# Altium PCB 无人驾驶车ECUV3.PcbDoc
Units mm, origin at the board's own origin, x right, y up, seen from the top; angles counter-clockwise.
Board outline 152.4 x 101.6 mm, 2 copper layers (Top Layer, Bottom Layer); 58 components, 64 nets, 464 pads, 98 vias.
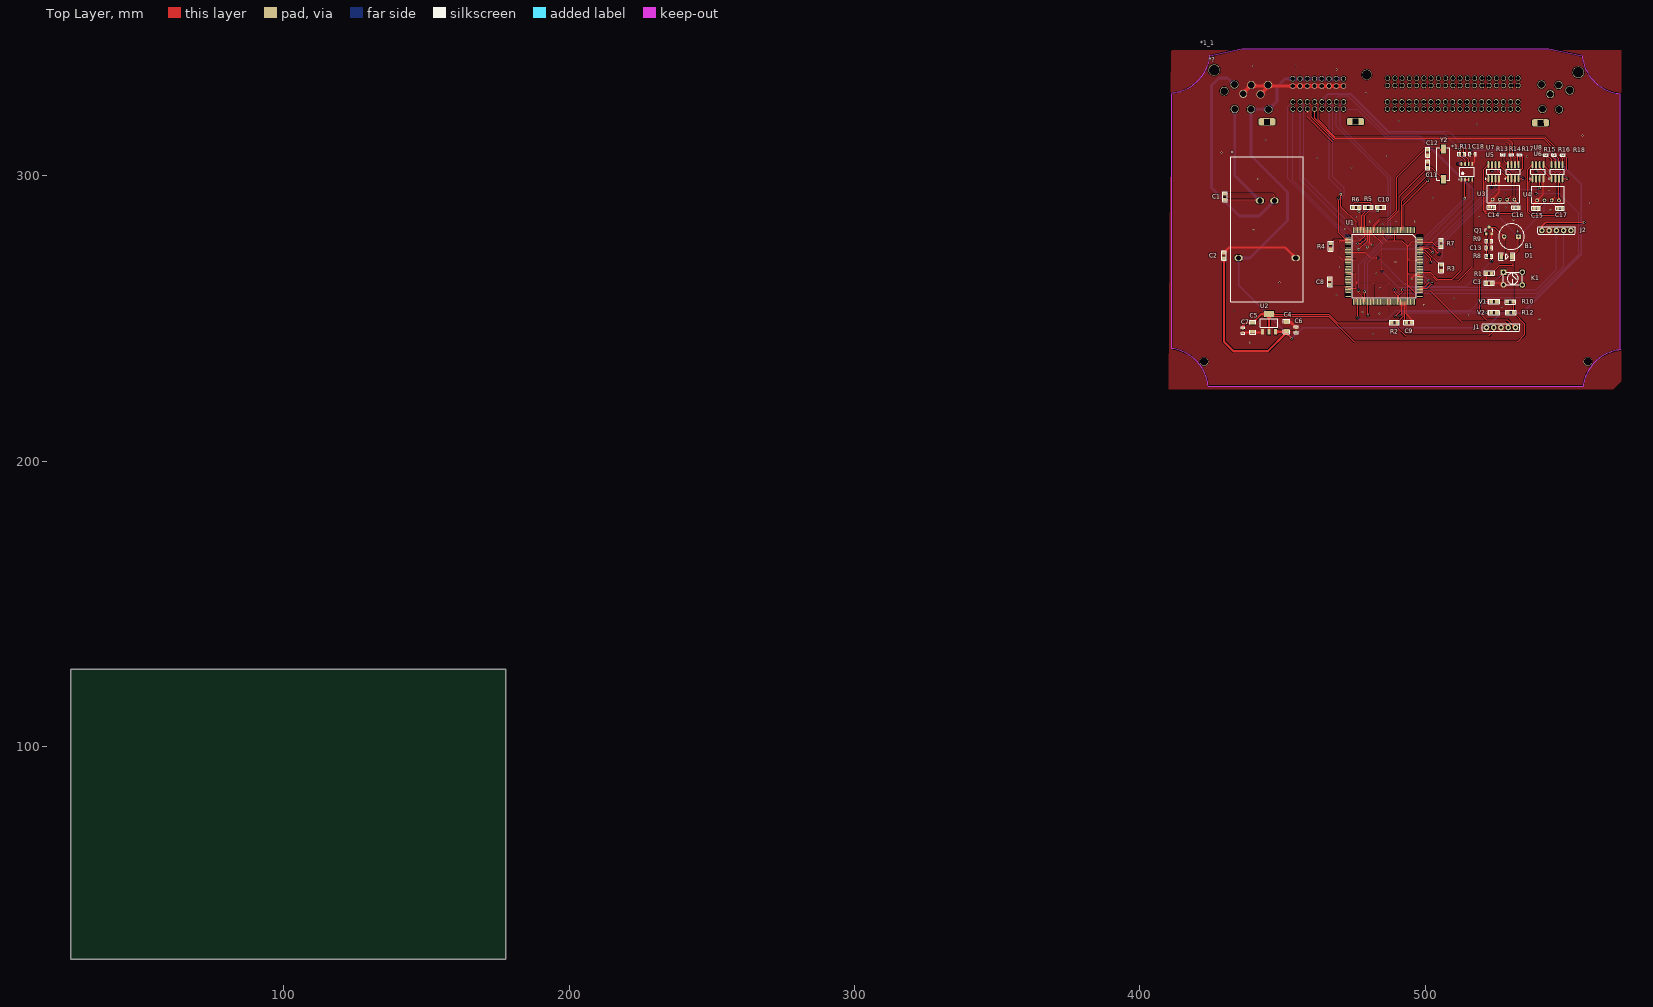
[diagram p0: Top Layer view]
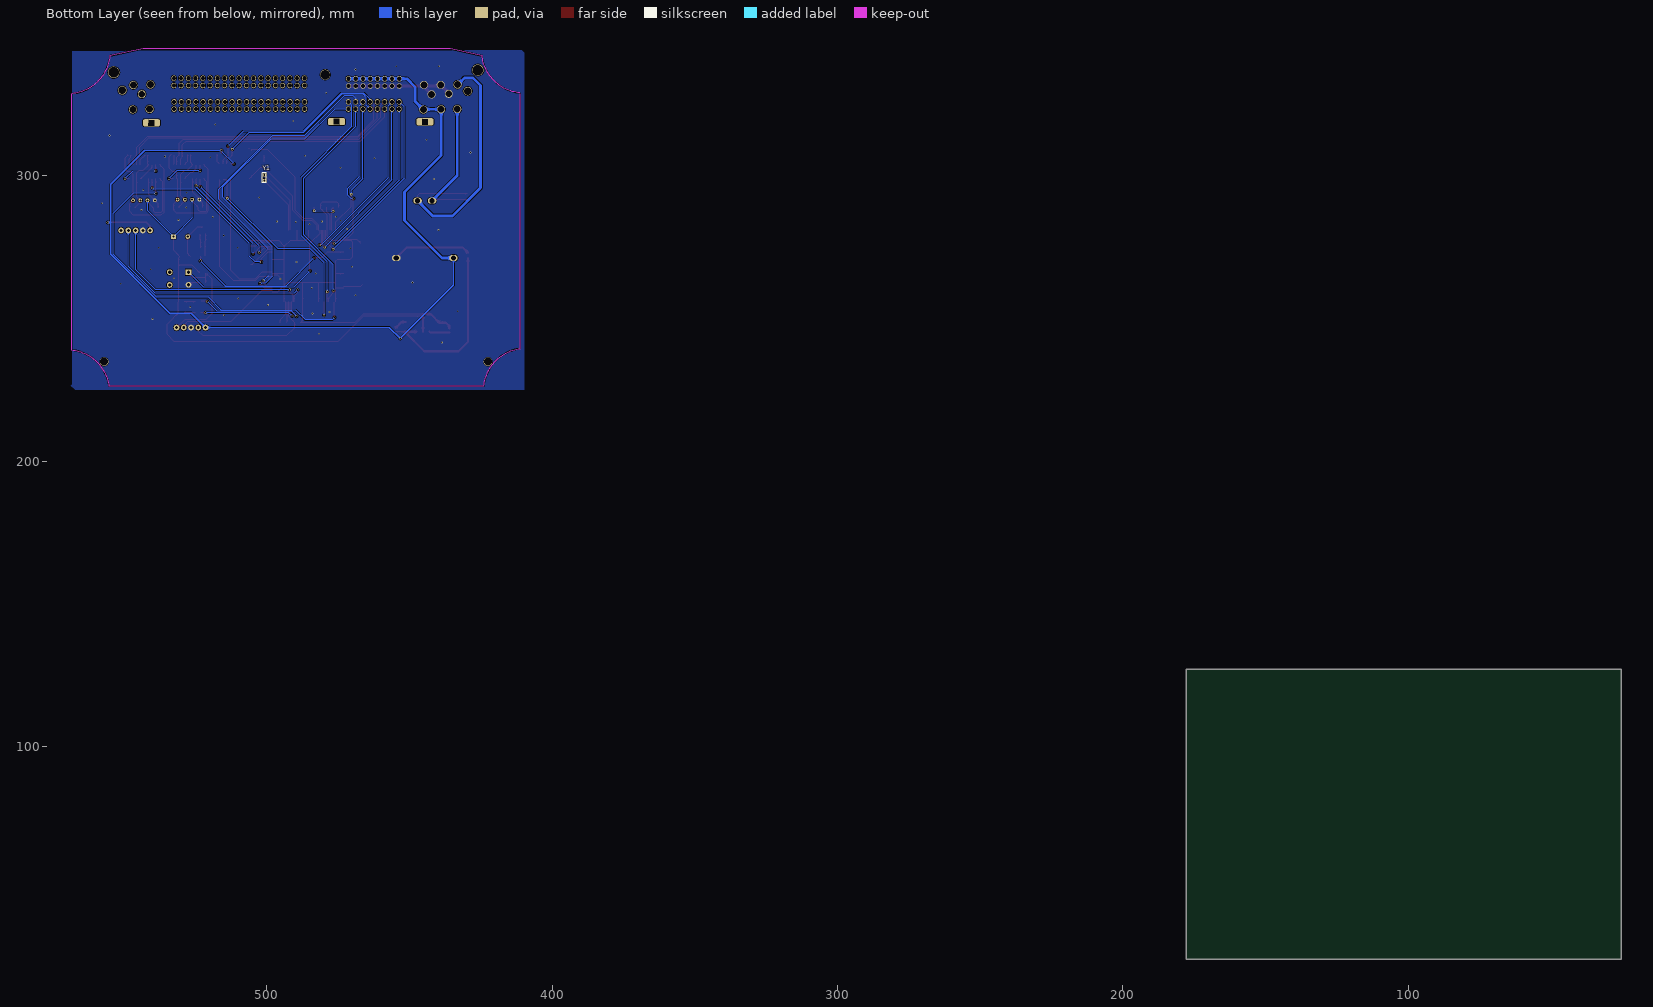
[diagram p1: Bottom Layer view, seen from below]

## Layer stack, top to bottom
Top Solder: solder mask 0.0102, Solder Resist, Dk 3.5
Top Layer: signal copper 0.0356
Dielectric 1: dielectric 0.32, FR-4, Dk 4.8
Bottom Layer: signal copper 0.0356
Bottom Solder: solder mask 0.0102, Solder Resist, Dk 3.5

## Board outline
25.4,25.4 177.8,25.4 177.8,127 25.4,127

## Design rules (kind name [scope] priority, off if disabled: settings)
Clearance [All] p1: gap=0.2 ignorepadtopadclearanceinfootprint=FALSE
PolygonConnect [All] p1: connectstyle=Direct reliefconductorwidth=0.254 reliefentries=4 polygonreliefangle="90 Angle" airgapwidth=0.254
RoutingVias [All] p1: holewidth=0.711 width=1.27 viastyle="Through Hole" minholewidth=0.711 minwidth=1.27 maxholewidth=0.711 maxwidth=1.27
SolderMaskExpansion [All] p1: expansion=0.102
Width [All] p1: maxlimit=0.254 minlimit=0.254 preferedwidth=0.254
30 further rules are at their usual default settings.

## Components (designator, comment, footprint, x,y, rotation, side; value= is the part's Value field where it differs from the comment)
* "12V转5V模块" 12V转5V模块 431.8,306.562 r270 top
*1 "MAX485" SOP127P600X175-8N 514.604,301.371 r90 top
*1_1 "大ECU外壳" 大ECU外壳 570.821,345.671 r180 top locked
*? "121针车载接头" 121针车载接头 550.367,343.459 r270 top locked
B1 "Buzzer" Buzzer_0905_9*5.5mm 530.185,278.638 r0 top
C1 "0.1uF" 0805_C_M 429.768,293.665 r270 top
C2 "0.1uF" 0805_C_M 429.514,273.059 r270 top
C3 "0.1uF" 0805_c_m 523.408,262.382 r180 top
C4 "CAP_POL" CAPC_1206 451.358,247.142 r90 top
C5 "CAP_POL" CAPC_1206 439.547,246.888 r270 top
C6 "CAP" CAPC_0603_2 454.787,245.999 r270 top value=0.1uf
C7 "CAP" CAPC_0603_2 436.118,245.745 r90 top value=0.1uf
C8 "0.1uF" 0805_C_M 466.598,263.788 r270 top
C9 "0.1uF" 0805_C_M 495.341,248.539 r180 top
C10 "0.1uF" 0805_c_m 483.353,288.925 r0 top
C11 "30pF" 0805_C_M 500.888,302.759 r90 top
C12 "30pF" 0805_C_M 500.888,309.159 r270 top
C13 "CAP" CAPC_0603_2 522.351,274.701 r180 top value=0.1uf
C14 "10UF" SMT_C_0603 523.24,288.925 r0 top
C15 "10UF" SMT_C_0603 538.861,288.544 r0 top
C16 "10UF" SMT_C_0603 531.838,288.798 r180 top
C17 "10UF" SMT_C_0603 547.243,288.544 r180 top
C18 "CAP" CAPC_0603_2 516.604,307.594 r180 top value=0.1uf
D1 "1N4148" SOD_80 526.669,271.653 r0 top
J1 "5脚排针" 5脚排针 521.462,246.761 r0 top
J2 "5脚排针" 5脚排针 540.893,280.797 r0 top
K1 "KEY1" KEY4 527.431,266.192 r0 top
Q1 "NPN" SOT23_3 522.351,280.797 r270 top
R1 "10k" 0805_R_M 522.367,265.811 r0 top
R2 "10k" 0805_R_M 489.204,248.539 r180 top
R3 "10k" 0805_R_M 505.587,267.716 r90 top
R4 "10k" 0805_R_M 466.852,275.209 r90 top
R5 "0" 0805_R_M 480.044,288.925 r180 top
R6 "0" 0805_R_M 475.742,288.925 r0 top
R7 "OPEN" 0805_R_M 505.587,276.225 r270 top
R8 "RES" RESC_0603_2 522.351,271.78 r180 top value=1K
R9 "RES" RESC_0603_2 522.351,277.114 r180 top value=10k
R10 "2.2k" 0805_R_M 529.844,255.778 r0 top
R11 "RES" RESC_0603_2 512.826,307.594 r180 top value=120R
R12 "2.2k" 0805_R_M 529.971,251.968 r0 top
R13 "10K" SMT_R_0402 527.177,307.34 r180 top
R14 "120R" SMT_R_0402 530.098,307.34 r180 top
R15 "10K" SMT_R_0402 542.163,307.213 r180 top
R16 "120R" SMT_R_0402 545.084,307.213 r180 top
R17 "10K" SMT_R_0402 533.019,307.34 r0 top
R18 "10K" SMT_R_0402 548.132,307.213 r0 top
U1 "STM32F429IGT6_F767IGT6_H743IIT6" LQFP176 496.318,280.924 r270 top
U2 "AMS1117" SOT223-AMS1117 445.262,248.412 r270 top
U3 "B0303S" BXXXXS 527.431,291.592 r180 top
U4 "B0303S" BXXXXS 543.052,291.338 r180 top
U5 "ADuM1201" SOP-8_M 524.002,301.371 r90 top
U6 "ADuM1201" SOP-8_M 539.496,301.371 r90 top
U7 "SN65HVD234D" SOP-8_M 530.86,301.371 r90 top
U8 "SN65HVD234D" SOP-8_M 546.227,301.371 r90 top
V1 "LED" 0805D 525.145,255.905 r180 top
V2 "LED" 0805D 525.145,251.968 r180 top
Y1 "32.768K" 0805_C_M 500.888,300.269 r270 bottom
Y2 "25M" XTAL_SMD_49S 506.349,304.038 r270 top

## Footprints (in the part's own frame and the unit in brackets; to place one, negate y for a bottom-side part, rotate by r counter-clockwise, add the part's x,y. Pads: shape width x height; smd on the part's side, far side on the other; paste and mask are expansions set on the pad)
5脚排针 [mm]
  round 2 hole 1: 1(0,0) 2(2.54,0) 3(5.08,0) 4(7.62,0) 5(10.16,0)
  silkscreen extent -1.52,-1.27 11.68,1.27
12V转5V模块 [mm]
  oval 2.1x3 hole 1.8: 1(15.351,15.367) 2(15.351,10.287) 3(35.417,2.794) 4(35.417,22.86)
  silkscreen extent 0,0 50.8,25.53
121针车载接头 [mil]
  round 157.48 hole 145.67: 0(256,-4894) 0(286,129)
  round 137.8 hole 129.92: 0(318,-2789)
  round 118.11 hole 102.36: 0(535,10) 0(544,-4755)
  rrect50% 98.43x236.22 hole 78.74 square: 0(966,-2945) 0(968,-4165) 0(982,-392)
  round 110.24 hole 94.49: 1(462,-142) 2(455,-379) 3(588,-258) 4(799,-135) 5(794,-366) 114(459,-4151) 115(459,-4382) 116(456,-4615) 117(591,-4256) 118(582,-4493) 119(801,-4144) 120(796,-4388) 121(793,-4611)
  oval 75x65 hole 57.09: 6(793,-2504) 7(793,-2404) 8(793,-2304) 9(793,-2204) 10(793,-2104) 11(793,-2004) 12(793,-1904) 13(793,-1804) 14(793,-1704) 15(793,-1604) 16(793,-1504) 17(793,-1404) 18(793,-1304) 19(793,-1204) 20(793,-1104) 21(793,-1004) 22(793,-904) 23(793,-804) 24(793,-704) 25(693,-2504) 26(693,-2404) 27(693,-2304) 28(693,-2204) 29(693,-2104) 30(693,-2004) 31(693,-1904) 32(693,-1804) 33(693,-1704) 34(693,-1604) 35(693,-1504) 36(693,-1404) 37(693,-1304) 38(693,-1204) 39(693,-1104) 40(693,-1004) 41(693,-904) 42(693,-804) 43(693,-704) 44(468,-2501) 45(468,-2401) 46(468,-2301) 47(468,-2201) 48(468,-2101) 49(468,-2001) 50(468,-1901) 51(468,-1801) 52(468,-1701) 53(468,-1601) 54(468,-1501) 55(468,-1401) 56(468,-1301) 57(468,-1201) 58(468,-1101) 59(468,-1001) 60(468,-901) 61(468,-801) 62(468,-701) 63(368,-2501) 64(368,-2401) 65(368,-2301) 66(368,-2201) 67(368,-2101) 68(368,-2001) 69(368,-1901) 70(368,-1801) 71(368,-1701) 72(368,-1601) 73(368,-1501) 74(368,-1401) 75(368,-1301) 76(368,-1201) 77(368,-1101) 78(368,-1001) 79(368,-901) 80(368,-801) 81(368,-701) 82(375,-3110) 83(375,-3210) 84(375,-3310) 85(375,-3410) 86(375,-3510) 87(375,-3610) 88(375,-3710) 89(375,-3810) 90(475,-3110) 91(475,-3210) 92(475,-3310) 93(475,-3410) 94(475,-3510) 95(475,-3610) 96(475,-3710) 97(475,-3810) 98(693,-3109) 99(693,-3209) 100(693,-3309) 101(693,-3409) 102(693,-3509) 103(693,-3609) 104(693,-3709) 105(693,-3809) 106(793,-3109) 107(793,-3209) 108(793,-3309) 109(793,-3409) 110(793,-3509) 111(793,-3609) 112(793,-3709) 113(793,-3809)
0805_C_M [mm]
  rect 1.2x1.27 smd mask+0.051: 1(0.041,0) 2(2.041,0)
  silkscreen extent -0.71,-0.78 2.79,0.78, body extent -0.01,-0.65 2.09,0.65, height 1.1
0805_c_m [mm]
  rect 1.2x1.27 smd mask+0.051: 1(0.041,0) 2(2.041,0)
  silkscreen extent -0.71,-0.78 2.79,0.78, body extent -0.01,-0.65 2.09,0.65, height 1.1
0805_R_M [mm]
  rect 1.2x1.27 smd mask+0.051: 1(-1,0) 2(1,0)
  silkscreen extent -1.75,-0.78 1.75,0.78, body extent -1.05,-0.65 1.05,0.65, height 0.51
0805D [mil]
  rect 50x50 smd mask+2: 1(0,0) 2(80,0)
  silkscreen extent -31,-31 124,31, body extent -7,-25 87,25, height 39
Buzzer_0905_9*5.5mm [mm]
  rect 1.6x1.6 hole 0.8: 1(2.5,0)
  round 1.6 hole 0.8: 2(-2.5,0)
  silkscreen extent -4.5,-4.5 4.5,4.5, body extent -4.5,-4.5 4.5,4.5, height 5.7
BXXXXS [mm]
  round 1.3 hole 0.7: 1(3.81,0) 2(1.27,0) 3(-1.27,0) 4(-3.81,0)
  silkscreen extent -5.75,-4.97 5.75,1.03
CAPC_0603_2 [mm]
  rect 0.8x0.85 smd: 1(-0.73,0) 2(0.73,0)
  silkscreen extent -1.35,-0.65 1.35,0.65, body extent -0.8,-0.4 0.8,0.4, height 0.6
CAPC_1206 [mm]
  rect 1.3x1.7 smd: 1(-1.6,0) 2(1.6,0)
  silkscreen extent -2.5,-1.1 2.5,1.1, body extent -1.6,-0.8 1.6,0.8, height 0.95
KEY4 [mm]
  rect 2x2 hole 1.2: 1(0,0)
  round 2 hole 1.2: 2(0,-4.445) 3(6.604,-4.5) 4(6.604,0)
  silkscreen extent -0.05,-4.5 6.55,0, body extent 0,-5.03 6.6,0.58, height 3.81
LQFP176 [mil]
  oval 80x11 smd: 1(0,-0.1) 2(0,-19.79) 3(0,-39.47) 4(0,-59.16) 5(0,-78.84) 6(0,-98.53) 7(0,-118.21) 8(0,-137.9) 9(0,-157.58) 10(0,-177.27) 11(0,-196.95) 12(0,-216.64) 13(0,-236.32) 14(0,-256.01) 15(0,-275.69) 16(0,-295.38) 17(0,-315.06) 18(0,-334.75) 19(0,-354.43) 20(0,-374.12) 21(0,-393.8) 22(0,-413.49) 23(0,-433.17) 24(0,-452.86) 25(0,-472.54) 26(0,-492.23) 27(0,-511.91) 28(0,-531.6) 29(0,-551.28) 30(0,-570.97) 31(0,-590.65) 32(0,-610.34) 33(0,-630.02) 34(0,-649.71) 35(0,-669.39) 36(0,-689.08) 37(0,-708.76) 38(0,-728.45) 39(0,-748.13) 40(0,-767.82) 41(0,-787.5) 42(0,-807.19) 43(0,-826.87) 44(0,-846.56) 89(990.16,-846.56) 90(990.16,-826.87) 91(990.16,-807.19) 92(990.16,-787.5) 93(990.16,-767.82) 94(990.16,-748.13) 95(990.16,-728.45) 96(990.16,-708.76) 97(990.16,-689.08) 98(990.16,-669.39) 99(990.16,-649.71) 100(990.16,-630.02) 101(990.16,-610.34) 102(990.16,-590.65) 103(990.16,-570.97) 104(990.16,-551.28) 105(990.16,-531.6) 106(990.16,-511.91) 107(990.16,-492.23) 108(990.16,-472.54) 109(990.16,-452.86) 110(990.16,-433.17) 111(990.16,-413.49) 112(990.16,-393.8) 113(990.16,-374.12) 114(990.16,-354.43) 115(990.16,-334.75) 116(990.16,-315.06) 117(990.16,-295.38) 118(990.16,-275.69) 119(990.16,-256.01) 120(990.16,-236.32) 121(990.16,-216.64) 122(990.16,-196.95) 123(990.16,-177.27) 124(990.16,-157.58) 125(990.16,-137.9) 126(990.16,-118.21) 127(990.16,-98.53) 128(990.16,-78.84) 129(990.16,-59.16) 130(990.16,-39.47) 131(990.16,-19.79) 132(990.16,-0.1)
  oval 11x80 smd: 45(71.85,-918.41) 46(91.54,-918.41) 47(111.22,-918.41) 48(130.91,-918.41) 49(150.59,-918.41) 50(170.28,-918.41) 51(189.96,-918.41) 52(209.65,-918.41) 53(229.33,-918.41) 54(249.02,-918.41) 55(268.7,-918.41) 56(288.39,-918.41) 57(308.07,-918.41) 58(327.76,-918.41) 59(347.44,-918.41) 60(367.13,-918.41) 61(386.81,-918.41) 62(406.5,-918.41) 63(426.18,-918.41) 64(445.87,-918.41) 65(465.55,-918.41) 66(485.24,-918.41) 67(504.92,-918.41) 68(524.61,-918.41) 69(544.29,-918.41) 70(563.98,-918.41) 71(583.66,-918.41) 72(603.35,-918.41) 73(623.03,-918.41) 74(642.72,-918.41) 75(662.4,-918.41) 76(682.09,-918.41) 77(701.77,-918.41) 78(721.46,-918.41) 79(741.14,-918.41) 80(760.83,-918.41) 81(780.51,-918.41) 82(800.2,-918.41) 83(819.88,-918.41) 84(839.57,-918.41) 85(859.25,-918.41) 86(878.94,-918.41) 87(898.62,-918.41) 88(918.31,-918.41) 133(918.31,71.75) 134(898.62,71.75) 135(878.94,71.75) 136(859.25,71.75) 137(839.57,71.75) 138(819.88,71.75) 139(800.2,71.75) 140(780.51,71.75) 141(760.83,71.75) 142(741.14,71.75) 143(721.46,71.75) 144(701.77,71.75) 145(682.09,71.75) 146(662.4,71.75) 147(642.72,71.75) 148(623.03,71.75) 149(603.35,71.75) 150(583.66,71.75) 151(563.98,71.75) 152(544.29,71.75) 153(524.61,71.75) 154(504.92,71.75) 155(485.24,71.75) 156(465.55,71.75) 157(445.87,71.75) 158(426.18,71.75) 159(406.5,71.75) 160(386.81,71.75) 161(367.13,71.75) 162(347.44,71.75) 163(327.76,71.75) 164(308.07,71.75) 165(288.39,71.75) 166(268.7,71.75) 167(249.02,71.75) 168(229.33,71.75) 169(209.65,71.75) 170(189.96,71.75) 171(170.28,71.75) 172(150.59,71.75) 173(130.91,71.75) 174(111.22,71.75) 175(91.54,71.75) 176(71.85,71.75)
  silkscreen extent 58,-861 933,16, body extent -1,-920 990,75, height 50
RESC_0603_2 [mm]
  rect 0.8x0.85 smd: 1(-0.73,0) 2(0.73,0)
  silkscreen extent -1.35,-0.65 1.35,0.65, body extent -0.8,-0.4 0.8,0.4, height 0.38
SMT_C_0603 [mm] "Surface mount capacitor 0603"
  rect 1x1 smd: 1(-0.8,0) 2(0.8,0)
  silkscreen extent -1.45,-0.66 1.45,0.66, body extent -1,-0.39 1,0.39, height 0.79
SMT_R_0402 [mil] "Surface mount resistor 0402"
  rect 20x20 smd: 1(-20,0) 2(20,0)
  silkscreen extent -36,-15 36,15, body extent -20,-10 20,10, height 20
SOD_80 [mm]
  rect 1.25x2 smd: 1(0,0) 2(3.75,0)
  silkscreen extent -0.9,-1.3 4.7,1.3, body extent 0.25,-0.8 3.55,0.8, height 1.59
SOP127P600X175-8N [mm] "SOP, 8-Leads, Body 4.90x3.91mm, Pitch 1.27mm, IPC Medium Density"
  oval 1.45x0.6 smd: 1(-2.725,1.905) 2(-2.725,0.635) 3(-2.725,-0.635) 4(-2.725,-1.905) 5(2.725,-1.905) 6(2.725,-0.635) 7(2.725,0.635) 8(2.725,1.905)
  silkscreen extent -2.85,-2.5 1.6,2.88, body extent -3,-2.5 3,2.5, height 1.75
SOP-8_M [mm] "8-Pin Small Outline Integrated Circuit 1.27 mm Pitch, IPC Low Density"
  oval 2.5x0.7 smd: 1(-2.45,1.905) 2(-2.45,0.635) 3(-2.45,-0.635) 4(-2.45,-1.905) 5(2.45,-1.905) 6(2.45,-0.635) 7(2.45,0.635) 8(2.45,1.905)
  silkscreen extent -2.57,-2.5 0.8,2.93, body extent -2.92,-2.45 2.86,2.45, height 1.45
SOT23_3 [mm]
  rect 0.95x0.95 smd: 1(1.175,-0.95) 2(1.175,0.95) 3(-1.175,0)
  silkscreen extent -0.6,-1.3 0.4,1.3, body extent -1.34,-1.5 1.3,1.5, height 1.08
SOT223-AMS1117 [mm]
  rect 2x1 smd: 1(3.1,-2.3) 2(3.1,0) 3(3.1,2.3)
  rect 2.2x3.5 smd: 2(-3.1,0)
  silkscreen extent -1.5,-3 1.5,3, body extent -3.5,-3.25 3.5,3.25, height 1.64
XTAL_SMD_49S [mm]
  rect 3x1.8 smd: 1(-5.3,0) 2(5.3,0)
  silkscreen extent -5.7,-2.3 5.7,2.3, body extent -6.4,-2.43 6.4,2.4, height 4.4
大ECU外壳 [mm]
  round 3 hole 2.8: ""(13.817,110.873) ""(148.317,110.873)
  Keep-Out Layer lines w0.4: 146.299,3.715 135.02,1.196 27.501,1.196 15.828,3.734

## Part data
C1 C2 C3 C8 C9 C10 C11 C12: library part C1
C4 C5: "有极性电容", =47uf
C6 C7 C13 C18: "电容"
C14 C15 C16 C17: library part SMT_C
D1: library part "Diode 1N4148", "High Conductance Fast Diode", Code_JEDEC=DO-204-AH, ComponentLink1Description="Manufacturer Link", ComponentLink1URL=http://www.fairchildsemi.com/, ComponentLink2Description=Datasheet, ComponentLink2URL=http://www.fairchildsemi.com/ds/1N%2F1N4148.pdf, DatasheetVersion=1997, LatestRevisionDate=17-Jul-2002, LatestRevisionNote="Re-released for DXP Platform.", PackageDescription="Diode, Axial; Body 3.8 x 1.9 mm (LxDia. max), Lead Dia. 0.53 mm (max)", PackageReference=DO-35, Published=8-Jun-2000, Publisher="Altium Limited"
Q1: "三极管"
R1 R2 R3 R4 R5 R6 R7 R10 R12 Y1: library part R1
R8 R9 R11: "电阻"
R13 R14 R15 R16 R17 R18: library part SMT_R
U1: library part STM32F767IGT6, "STM32F767IGT6"
U2: "电源芯片_5V-3.3v"
V1 V2: library part LED2
Y2: library part XTAL, "晶振"

## Via types
v1: diameter 0.635, hole 0.508, Top Layer to Bottom Layer, 55 vias
v2: diameter 0.8, hole 0.65, Top Layer to Bottom Layer, 41 vias
v3: diameter 0.9, hole 0.7, Top Layer to Bottom Layer, 2 vias

## Nets (pads, with @x,y where several pads share a name; then routed paths per layer and width w, separated by ;. In a path a pad name is that pad's centre, name@x,y a point inside that pad or via, vN(x,y) a via of type N, cw(c..) or ccw(c..) an arc to the next point about the centre after c; other vN are vias at no path point)
1D: U5.6 U7.1 | length 7.1
  Top Layer w0.254: U5.6 524.637,302.514 526.161,300.99 526.886,300.99 U7.1
1P3.3V: C16.1 R17.2 U3.4 U5.8 U7.3 | length 52
  Top Layer w0.254: U5.8 520.446,302.17 520.446,287.648 521.274,286.82 531.549,286.82 532.638,287.909 C16.1 532.638,290.195 U3.4 531.241,298.667 U7.3 531.495,300.99 531.876,301.371 533.019,301.371 534.162,302.514 534.162,306.705 R17.2
1PGND: C16.2 R13.2 U3.3 U5.5 U7.2 | length 22.8
  Top Layer w0.254: R13.2 526.669,304.583 U5.5 527.976,301.752 528.955,301.752 530.225,300.482 U7.2 530.098,298.794 530.098,292.989 U3.3 528.701,291.135 C16.2
1R: U5.7 U7.4 | length 15.5
  Top Layer w0.254: v2(523.367,301.752) U5.7 ; U7.4 v2@534.125,298.921
  Bottom Layer w0.254: v2(523.367,301.752) 531.495,301.752 v2(534.289,298.958)
2D: U6.6 U8.1 | length 6.8
  Top Layer w0.254: U6.6 540.131,302.895 544.105,298.921 U8.1
2P3.3V: C17.1 R18.2 U4.4 U6.8 U8.3 | length 52.6
  Top Layer w0.254: U6.8 535.994,302.224 535.994,287.22 537.083,286.131 546.735,286.131 548.043,287.439 C17.1 548.043,290.157 U4.4 U8.3 546.862,300.482 547.751,301.371 548.64,301.371 549.529,302.26 549.529,306.324 R18.2
2PGND: C17.2 R15.2 U4.3 U6.5 U8.2 | length 22.7
  Top Layer w0.254: R15.2 541.655,304.075 U6.5 543.47,301.752 544.83,301.752 545.592,300.99 U8.2 545.592,292.608 U4.3 544.322,290.665 C17.2
2R: U6.7 U8.4 | length 15.7
  Top Layer w0.254: v2(538.861,301.625) U6.7 ; U8.4 v2(549.693,298.921)
  Bottom Layer w0.254: v2(538.861,301.625) 546.989,301.625 v2(549.693,298.921)
12V: *.2 *?.121 C1.2 | length 48.3
  Top Layer w0.254: C1.2 441.674,291.624 *.2
  Bottom Layer w1: *?.121 433.248,300.05 *.2
60V: 
485A: *1.6 *?.101 R11.1 | length 66.2
  Top Layer w0.254: v2(513.556,310.356) R11.1 513.556,307.245 515.239,305.562 *1.6
  Bottom Layer w0.254: *?.101 463.779,326.746 465.963,328.93 473.964,328.93 487.299,315.595 508.317,315.595 v2(513.556,310.356)
485B: *1.7 *?.109 R11.2 | length 65.9
  Top Layer w0.254: v2(512.096,309.213) R11.2 512.096,307.181 513.969,305.308 *1.7
  Bottom Layer w0.254: *?.109 465.074,324.612 465.074,327.279 466.271,328.476 473.656,328.476 487.172,314.96 506.349,314.96 v2(512.096,309.213)
"CAN1 RX(PB8）": U1.167 U5.2 | length 39.6
  Top Layer w0.254: U1.167 501.117,274.599 v2(502.666,273.05) ; v2@523.367,296.037 U5.2
  Bottom Layer w0.254: v2(502.666,273.05) 502.666,275.463 v2(523.24,296.037)
"CAN1 TX(PB9)": U1.168 U5.3 | length 42.4
  Top Layer w0.254: U1.168 502.268,275.099 v2(504.825,272.542) ; U5.3 524.764,298.794 v2(524.764,296.418)
  Bottom Layer w0.254: v2(504.825,272.542) 504.825,276.098 524.764,296.037 v2(524.764,296.418)
CAN1H: *?.111 R14.2 U7.7 | length 84.9
  Top Layer w0.254: *?.111 458.699,320.573 467.36,311.912 528.447,311.912 529.59,310.769 R14.2 529.59,306.578 530.225,305.943 U7.7
CAN1L: *?.103 R14.1 U7.6 | length 88.4
  Top Layer w0.254: *?.103 458.876,325.857 459.994,324.739 459.994,320.421 467.868,312.547 529.463,312.547 530.606,311.404 R14.1 531.495,306.451 U7.6
"CAN2 RX(PB12)": U1.92 U6.2 | length 130.1
  Top Layer w0.254: v2@476.315,250.317 U1.92 ; v2(538.861,293.751) U6.2
  Bottom Layer w0.254: v2(476.25,250.317) 477.139,249.428 486.41,249.428 489.858,252.876 515.893,252.876 520.319,257.302 538.607,257.302 553.72,272.415 553.72,286.766 546.735,293.751 v2(538.861,293.751)
"CAN2 TX（PB6）": U1.164 U6.3 | length 60.6
  Top Layer w0.254: U1.164 499.696,273.099 501.904,270.891 v2(501.904,269.748) ; v2(540.131,295.656) U6.3
  Bottom Layer w0.254: v2(501.904,269.748) 504.063,269.748 506.095,271.78 506.095,276.225 525.018,295.148 539.623,295.148 v2(540.131,295.656)
CAN2H: *?.110 R16.2 U8.7 | length 97.3
  Top Layer w0.254: *?.110 461.239,320.192 468.376,313.055 541.528,313.055 544.576,310.007 R16.2 544.576,306.578 545.592,305.562 U8.7
CAN2L: *?.102 R16.1 U8.6 | length 100.8
  Top Layer w0.254: *?.102 461.543,325.857 462.534,324.866 462.534,319.539 468.383,313.69 541.909,313.69 545.592,310.007 R16.1 546.862,305.943 U8.6
GND: *1.5 *.4 *?.90 *?.91 *?.92 *?.93 *?.94 *?.95 *?.96 *?.97 *?.114 *?.115 *?.117 *?.118 C2.1 C3.1 C4.2 C5.2 C6.1 C7.1 C8.1 C9.1 C10.2 C11.2 C12.2 C13.1 C14.1 C15.1 C18.1 J1.3 J2.2 K1.2 Q1.2 R3.1 R4.1 R9.1 U1.14 U1.22 U1.37 U1.61 U1.71 U1.90 U1.102 U1.113 U1.126 U1.135 U1.148 U1.158 U2.1 U3.1 U4.1 U5.4 U6.4 | length 130.3
  Top Layer w0.254: U1.126 493.315,251.54 495.3,249.555 C9.1 ; v1(495.173,263.779) 495.173,264.033 496.239,265.099 U1.148 ; C11.2 C12.2 ; *1.5 517.334,304.921 C18.1 ; C14.1 522.44,290.411 U3.1 523.621,291.846 525.907,294.132 U5.4 ; C13.1 R9.1 523.301,277.334 Q1.2 ; C3.1 526.796,262.382 K1.2 ; C15.1 538.061,290.157 U4.1 541.401,293.497 U6.4
  Top Layer w0.8: C2.1 431.324,274.828 450.977,274.828 *.4 ; C7.1 442.665,245.015 U2.1 ; C4.2 452.774,248.742 C6.1
  Top Layer w1: *?.118 436.245,328.981 *?.115 439.471,331.394 *?.114@444.932,331.394 ; *?.117 444.932,331.114 *?.114@444.932,331.394 ; *?.114 *?.114@444.932,331.394 ; *?.90 *?.91 *?.92 *?.93 *?.94 *?.95 *?.96 *?.97 *?.114@444.932,331.394
  other v1: 438.658,241.554 481.711,244.602 540.004,249.809 514.985,251.079 483.997,251.714 478.028,252.222 433.07,252.476 526.796,254 499.618,254.635 510.032,256.921 468.884,258.064 484.251,260.604 551.18,262.128 448.945,262.509 532.511,264.033 482.854,265.684 540.639,267.208 470.154,268.097 489.585,269.748 470.789,274.574 510.159,274.701 537.845,274.701 515.112,279.019 439.801,280.924 471.932,281.305 485.013,282.956 489.839,283.718 480.695,283.972 496.443,283.972 474.091,284.226 530.987,284.48 518.922,285.496 475.742,285.623 543.941,287.909 528.193,288.798 557.784,290.322 502.666,292.354 528.066,294.005 543.306,295.021 441.452,298.831 474.218,302.768 462.28,306.07 519.811,306.451 535.686,306.705 486.664,306.959 428.625,308.102 443.992,312.547 555.117,314.071 518.033,317.881 490.728,319.151 479.171,328.93 468.884,337.185 439.674,338.328 454.66,338.328
GNDN: *.1 *?.116 C1.1 | length 93.9
  Top Layer w0.254: C1.1 446.659,293.624 447.167,293.116 *.1
  Bottom Layer w1: *?.116 430.766,334.256 427.728,334.256 425.069,331.597 425.069,295.783 434.975,285.877 441.833,285.877 *.1
NetB1_2: B1.2 D1.1 Q1.3 | length 14.1
  Top Layer w0.254: Q1.3 524.351,281.972 B1.2 527.685,272.669 D1.1
NetC8_2: C8.2 U1.81 | length 6.7
  Top Layer w0.254: C8.2 467.246,261.099 U1.81
NetC9_2: C9.2 U1.125 | length 7.4
  Top Layer w0.254: U1.125 492.815,249.024 C9.2
NetC10_1: C10.1 R6.2 U1.39 | length 17.6
  Top Layer w0.254: v2(476.742,287.512) R6.2 477.315,288.352 U1.39 ; v2(483.394,287.687) C10.1
  Bottom Layer w0.254: v2(476.742,287.512) 483.219,287.512 v2(483.394,287.687)
NetC11_1: C11.1 U1.29 Y2.2 | length 38.5
  Top Layer w0.254: U1.29 482.315,282.417 484.124,284.226 487.172,284.226 490.855,287.909 490.855,292.767 C11.1 502.287,302.8 Y2.2
NetC12_1: C12.1 U1.30 Y2.1 | length 43.4
  Top Layer w0.254: U1.30 481.815,282.559 484.117,284.861 487.045,284.861 490.093,287.909 490.093,299.466 499.745,309.118 C12.1 505.165,309.118 Y2.1@505.52,308.763 ; Y2.1@506.229,309.338 Y2.1
NetC13_2: C13.2 Q1.1 R8.2 R9.2 | length 7.9
  Top Layer w0.254: Q1.1 521.401,277.334 R9.2 C13.2 R8.2
NetR3_2: R3.2 U1.166 | length 9.7
  Top Layer w0.254: U1.166 499.839,274.099 505.222,268.716 R3.2
NetR4_2: R4.2 U1.48 | length 6.7
  Top Layer w0.254: R4.2 468.242,277.599 U1.48
NetR5_2: R5.2 U1.38 | length 8.5
  Top Layer w0.254: U1.38 477.815,286.172 479.044,287.401 R5.2
NetR7_2: R7.2 U1.171 | length 8
  Top Layer w0.254: U1.171 502.419,276.599 503.793,275.225 R7.2
NetR10_1: R10.1 V1.1 | length 3.8
  Top Layer w0.254: V1.1 525.272,255.778 R10.1
NetR12_1: R12.1 V2.1 | length 3.8
  Top Layer w0.254: V2.1 R12.1
NetR13_1: R13.1 U7.8 | length 4
  Top Layer w0.254: R13.1 527.685,305.091 U7.8
NetR15_1: R15.1 U8.8 | length 4.1
  Top Layer w0.254: R15.1 544.322,305.562 U8.8
NetR17_1: R17.1 U7.5 | length 3.6
  Top Layer w0.254: R17.1 532.511,304.075 U7.5
NetR18_1: R18.1 U8.5 | length 3.6
  Top Layer w0.254: R18.1 547.624,306.451 548.132,305.943 U8.5
NetU1_9: U1.9 Y1.2 | length 20.9
  Top Layer w0.254: U1.9 492.315,289.655 v3(500.888,298.228)
NetU1_10: U1.10 Y1.1 | length 23.1
  Top Layer w0.254: U1.10 491.815,291.155 v3(500.888,300.228)
PA11(LED): U1.122 V1.2 | length 41.5
  Top Layer w0.254: v2(489.585,250.698) 491.315,252.428 U1.122 ; v2(520.827,255.905) V1.2
  Bottom Layer w0.254: v2(489.585,250.698) 491.309,252.422 517.344,252.422 v2(520.827,255.905)
PA12(LED): U1.123 V2.2 | length 37.7
  Top Layer w0.254: v2(491.109,250.825) 491.815,251.531 U1.123 ; v2(521.462,251.968) V2.2
  Bottom Layer w0.254: v2(491.109,250.825) 492.252,251.968 v2(521.462,251.968)
PB1(FM): R8.1 U1.57 | length 60.5
  Top Layer w0.254: U1.57 478.839,273.099 480.793,271.145 v2(483.489,271.145) ; R8.1 523.081,270.288 v2(523.24,270.129)
  Bottom Layer w0.254: v2(483.489,271.145) 493.322,261.312 514.423,261.312 v2(523.24,270.129)
PC0: *?.104 U1.32 | length 66.4
  Top Layer w0.254: U1.32 480.815,276.359 v2(481.457,275.717)
  Bottom Layer w0.254: *?.104 457.454,324.561 457.454,299.212 480.949,275.717 v2(481.457,275.717)
PC1: *?.112 U1.33 | length 64.3
  Top Layer w0.254: v2(479.679,274.955) 480.315,275.591 U1.33
  Bottom Layer w0.254: *?.112 456.159,298.475 v2(479.679,274.955)
PC2: *?.105 U1.34 | length 70.7
  Top Layer w0.254: v2(476.758,274.193) 479.815,277.25 U1.34
  Bottom Layer w0.254: *?.105 451.866,324.104 451.866,299.085 v2(476.758,274.193)
PC3: *?.113 U1.35 | length 63.6
  Top Layer w0.254: v2(476.377,276.225) 477.647,276.225 479.315,277.893 U1.35
  Bottom Layer w0.254: *?.113 453.619,298.348 475.742,276.225 v2(476.377,276.225)
PD5(485_D): *1.4 U1.147 | length 51.5
  Top Layer w0.254: U1.147 502.601,264.599 504.002,263.198 511.61,263.198 516.509,268.097 *1.4
PD6(485_R): *1.1 U1.150 | length 48.7
  Top Layer w0.254: U1.150 501.743,266.099 504.19,263.652 509.524,263.652 512.699,266.827 *1.1
PD11(485): *1.2 *1.3 U1.99 | length 74.8
  Top Layer w0.254: U1.99 v2@479.815,250.961 ; v2(479.933,251.079) v2@479.815,250.961 ; v2(513.842,292.1) 513.842,297.884 514.604,298.646 ; *1.2 514.604,298.646 ; *1.3 514.604,298.646 ; v2@479.815,250.961 479.806,250.952 479.815,250.943 v2@479.815,250.961
  Bottom Layer w0.254: v2(479.933,251.079) 479.933,269.494 484.759,274.32 496.062,274.32 v2(513.842,292.1)
RST: C3.2 J1.5 K1.1 R1.1 U1.31 | length 103.1
  Top Layer w0.254: U1.31 481.348,280.891 481.348,279.854 484.886,276.317 v2(484.886,266.573) ; C3.2 521.367,264.16 ; K1.1 527.431,265.684 525.907,264.16 521.367,264.16 ; J1.5 528.828,249.555 521.335,249.555 519.176,251.714 519.176,263.62 R1.1 521.367,264.16
  Bottom Layer w0.254: v2(484.886,266.573) 490.601,260.858 522.097,260.858 K1.1
SWCLK(PA14): J1.4 U1.137 | length 36.7
  Top Layer w0.254: U1.137 501.766,259.599 512.572,248.793 527.812,248.793 529.082,247.523 J1.4
SWDIO(PA13): J1.2 R2.1 U1.124 | length 46.8
  Top Layer w0.254: U1.124 492.315,250.65 R2.1 490.204,246.777 493.141,243.84 522.351,243.84 524.002,245.491 J1.2
USART1_RX(A10): J2.3 U1.121 | length 75.3
  Top Layer w0.254: U1.121 490.815,258.024 491.998,259.207 v2(491.998,259.969)
  Bottom Layer w0.254: v2(491.998,259.969) 538.861,259.969 545.973,267.081 J2.3
USART1_TX(A9): J2.4 U1.120 | length 80.9
  Top Layer w0.254: v2(489.204,259.969) 489.204,259.08 490.315,257.969 U1.120
  Bottom Layer w0.254: v2(489.204,259.969) 490.347,258.826 539.115,258.826 548.513,268.224 J2.4
USART2_RX(A3): *?.100 U1.47 | length 53.4
  Top Layer w0.254: v2(469.646,291.973) 469.646,280.035 471.582,278.099 U1.47
  Bottom Layer w0.254: *?.100 467.614,324.561 467.614,299.593 471.551,295.656 471.551,293.116 470.408,291.973 v2(469.646,291.973)
USART2_TX(A2): *?.108 U1.42 | length 46.3
  Top Layer w0.254: v2(470.408,293.497) 470.408,289.179 475.815,283.772 U1.42
  Bottom Layer w0.254: *?.108 466.319,298.983 470.408,294.894 v2(470.408,293.497)
"USART3 RX(PD9)": *?.98 U1.97 | length 81.9
  Top Layer w0.254: v2@478.536,259.334 478.815,259.055 U1.97
  Bottom Layer w0.254: *?.98 470.154,324.612 470.154,317.246 487.934,299.466 487.934,279.019 478.79,269.875 v2(478.79,259.334)
"USART3 TX(PD8)": *?.107 U1.96 | length 80.1
  Top Layer w0.254: v2(476.631,259.715) 476.631,258.953 478.315,257.269 U1.96
  Bottom Layer w0.254: *?.107 468.859,317.271 487.045,299.085 487.045,279.273 476.631,268.859 v2(476.631,259.715)
"USART4 RX（PC11)": *?.99 U1.140 | length 107.6
  Top Layer w0.254: U1.140 499.859,261.099 501.269,262.509 v2(501.269,263.144)
  Bottom Layer w0.254: *?.99 468.859,327.127 469.754,328.022 472.84,328.022 486.918,313.944 498.094,313.944 516.89,295.148 516.89,291.719 499.491,274.32 499.491,264.922 v2(501.269,263.144)
"USART4 TX(PC10)": *?.106 U1.139 | length 104.1
  Top Layer w0.254: U1.139 500.756,260.599 v2(502.412,262.255)
  Bottom Layer w0.254: *?.106 476.275,323.317 486.791,312.801 498.595,312.801 515.366,296.03 515.366,292.354 498.094,275.082 498.094,264.668 500.507,262.255 v2(502.412,262.255)
VCC_3.3V: B1.1 C5.1 C7.2 C14.2 C15.2 D1.2 R1.2 R2.2 R5.1 R6.1 R7.1 R10.2 R12.2 U1.15 U1.23 U1.36 U1.49 U1.62 U1.72 U1.82 U1.91 U1.103 U1.114 U1.127 U1.136 U1.149 U1.159 U1.172 U2.2 U3.2 U4.2 U5.1 U6.1 | length 438.1
  Top Layer w0.254: U1.82 475.693,260.599 475.815,260.477 ; U1.72 475.773,265.599 475.815,265.557 ; R6.1 474.742,290.084 475.361,290.703 480.568,290.703 481.044,290.227 R5.1 481.044,288.385 478.815,286.156 U1.36 478.815,278.79 477.124,277.099 U1.49 470.266,277.099 469.9,276.733 469.9,271.653 470.954,270.599 U1.62 475.399,270.599 475.815,270.183 475.815,265.557 ; U1.91 475.815,260.477 ; U1.103 481.815,262.405 481.711,262.509 ; U1.23 485.315,278.463 486.537,277.241 489.331,277.241 ; U1.15 489.315,277.257 489.331,277.241 ; U1.127 493.815,261.581 ; U1.136 496.297,259.099 493.815,261.581 ; U1.149 494.027,265.599 493.815,265.811 ; U1.159 494.107,270.599 493.815,270.891 ; R7.1 505.461,277.099 U1.172 495.666,277.099 493.815,275.248 ; U5.1 520.954,297.778 520.954,287.782 521.462,287.274 523.367,287.274 524.04,287.947 C14.2 526.161,291.046 U3.2 ; R1.2 526.161,268.605 530.844,268.605 ; B1.1 532.685,273.919 D1.2 530.844,271.228 530.844,268.605 ; U6.1 536.448,297.778 536.448,287.655 537.083,287.02 539.115,287.02 539.661,287.566 C15.2 541.782,290.665 U4.2 ; 475.815,260.477 475.815,262.509 ; 475.815,262.509 481.711,262.509 ; 475.815,262.509 475.815,265.557 ; 481.711,262.509 487.172,262.509 ; 487.172,262.509 492.887,262.509 493.815,261.581 ; 487.172,262.509 487.315,262.366 U1.114 487.315,249.428 R2.2 469.138,248.539 466.165,251.512 445.262,251.512 446.076,250.698 466.217,250.698 475.107,241.808 532.384,241.808 534.924,244.348 534.924,248.015 R12.2 530.971,255.651 R10.2 530.844,268.605 ; 489.331,277.241 491.822,277.241 493.815,275.248 ; 493.815,261.581 493.815,265.811 ; 493.815,265.811 493.815,270.891 ; 493.815,270.891 493.815,275.248
  Top Layer w0.8: C7.2 436.118,247.396 437.21,248.488 C5.1 442.571,251.512 445.262,251.512 U2.2@445.262,245.312
  Bottom Layer w0.254: U3.2 526.161,285.162 B1.1 541.782,287.735 U4.2
VCC_5: *1.8 *.3 *?.82 *?.83 *?.84 *?.85 *?.86 *?.87 *?.88 *?.89 *?.119 *?.120 C2.2 C4.1 C6.2 C18.2 J1.1 J2.1 U2.3 | length 417.2
  Top Layer w0.254: C4.1@451.631,245.269 C6.2 ; v2(511.487,304.096) *1.8 ; C18.2 v2(515.874,308.864)
  Top Layer w0.508: C4.1@451.358,245.312 451.358,244.996 451.358,244.856 v2(453.263,242.951) ; J2.1 540.893,282.194 542.29,283.591 v2(555.752,283.591)
  Top Layer w0.8: C2.2 429.514,241.808 432.816,238.506 444.868,238.506 451.358,244.996 C4.1@451.631,245.269 ; U2.3 C4.1@451.358,245.312
  Bottom Layer w0.254: v2(511.487,304.096) 515.874,308.483 v2(515.874,308.864)
  Bottom Layer w0.508: *.3 434.594,261.62 v2(453.263,242.951) 457.073,246.761 J1.1 526.542,251.841 534.035,251.841 554.609,272.415 554.609,283.591 ; v2(515.874,308.864) 542.798,308.864 554.609,297.053 554.609,283.591 ; v2(555.752,283.591) 554.609,283.591
  Bottom Layer w1: *.3 438.658,271.145 451.739,284.226 451.739,294.259 438.912,307.086 *?.120 444.983,323.24 *?.119 448.056,326.06 448.056,331.089 450.901,333.934 *?.89 *?.88 *?.87 *?.86 *?.85 *?.84 *?.83 *?.82
pads on no net: *1_1. *?.0 *?.1 *?.2 *?.3 *?.4 *?.5 *?.6 *?.7 *?.8 *?.9 *?.10 *?.11 *?.12 *?.13 *?.14 *?.15 *?.16 *?.17 *?.18 *?.19 *?.20 *?.21 *?.22 *?.23 *?.24 *?.25 *?.26 *?.27 *?.28 *?.29 *?.30 *?.31 *?.32 *?.33 *?.34 *?.35 *?.36 *?.37 *?.38 *?.39 *?.40 *?.41 *?.42 *?.43 *?.44 *?.45 *?.46 *?.47 *?.48 *?.49 *?.50 *?.51 *?.52 *?.53 *?.54 *?.55 *?.56 *?.57 *?.58 *?.59 *?.60 *?.61 *?.62 *?.63 *?.64 *?.65 *?.66 *?.67 *?.68 *?.69 *?.70 *?.71 *?.72 *?.73 *?.74 *?.75 *?.76 *?.77 *?.78 *?.79 *?.80 *?.81 J2.5 K1.3 K1.4 U1.1 U1.2 U1.3 U1.4 U1.5 U1.6 U1.7 U1.8 U1.11 U1.12 U1.13 U1.16 U1.17 U1.18 U1.19 U1.20 U1.21 U1.24 U1.25 U1.26 U1.27 U1.28 U1.40 U1.41 U1.43 U1.44 U1.45 U1.46 U1.50 U1.51 U1.52 U1.53 U1.54 U1.55 U1.56 U1.58 U1.59 U1.60 U1.63 U1.64 U1.65 U1.66 U1.67 U1.68 U1.69 U1.70 U1.73 U1.74 U1.75 U1.76 U1.77 U1.78 U1.79 U1.80 U1.83 U1.84 U1.85 U1.86 U1.87 U1.88 U1.89 U1.93 U1.94 U1.95 U1.98 U1.100 U1.101 U1.104 U1.105 U1.106 U1.107 U1.108 U1.109 U1.110 U1.111 U1.112 U1.115 U1.116 U1.117 U1.118 U1.119 U1.128 U1.129 U1.130 U1.131 U1.132 U1.133 U1.134 U1.138 U1.141 U1.142 U1.143 U1.144 U1.145 U1.146 U1.151 U1.152 U1.153 U1.154 U1.155 U1.156 U1.157 U1.160 U1.161 U1.162 U1.163 U1.165 U1.169 U1.170 U1.173 U1.174 U1.175 U1.176

## Polygon pours and split planes (outlines as drawn)
GND on Top Layer "Top Layer-No Net 1" (solid, pour order 6): 410.083,225.171 565.912,225.171 568.706,227.965 568.706,343.916 411.353,343.916 410.972,343.535
GND on Bottom Layer "Top Layer-No Net 1" (solid, pour order 8): 410.718,343.916 409.829,343.027 409.829,224.917 567.182,224.917 568.706,226.441 568.198,226.949 568.198,343.662

## Keep-outs
Keep-Out Layer:
  lines w0.254: 411.271,239.408 cw(c409.245,224.79) 423.927,226.278 ; 411.377,328.983 ccw(c409.888,343.666) 424.573,342.203 ; 554.993,341.937 ccw(c569.675,343.425) 568.212,328.74 ; 555.307,226.283 cw(c569.925,224.257) 568.437,238.939
  lines w0.4: 411.175,239.573 411.175,328.727 ; 423.927,226.289 555.346,226.289 ; 568.427,239.065 568.427,328.727

## Text inside footprints (layer, text, board x,y; h text height)
B1: Top Overlay "+" at 533.435,279.888 h2 r90